# Altium PCB mcuCore.PcbDoc
Units mil, origin at the board's own origin, x right, y up, seen from the top; angles counter-clockwise.
Board outline 3950.03 x 3947.04 mil, 2 copper layers (Top Layer, Bottom Layer); 53 components, 77 nets, 296 pads, 91 vias.
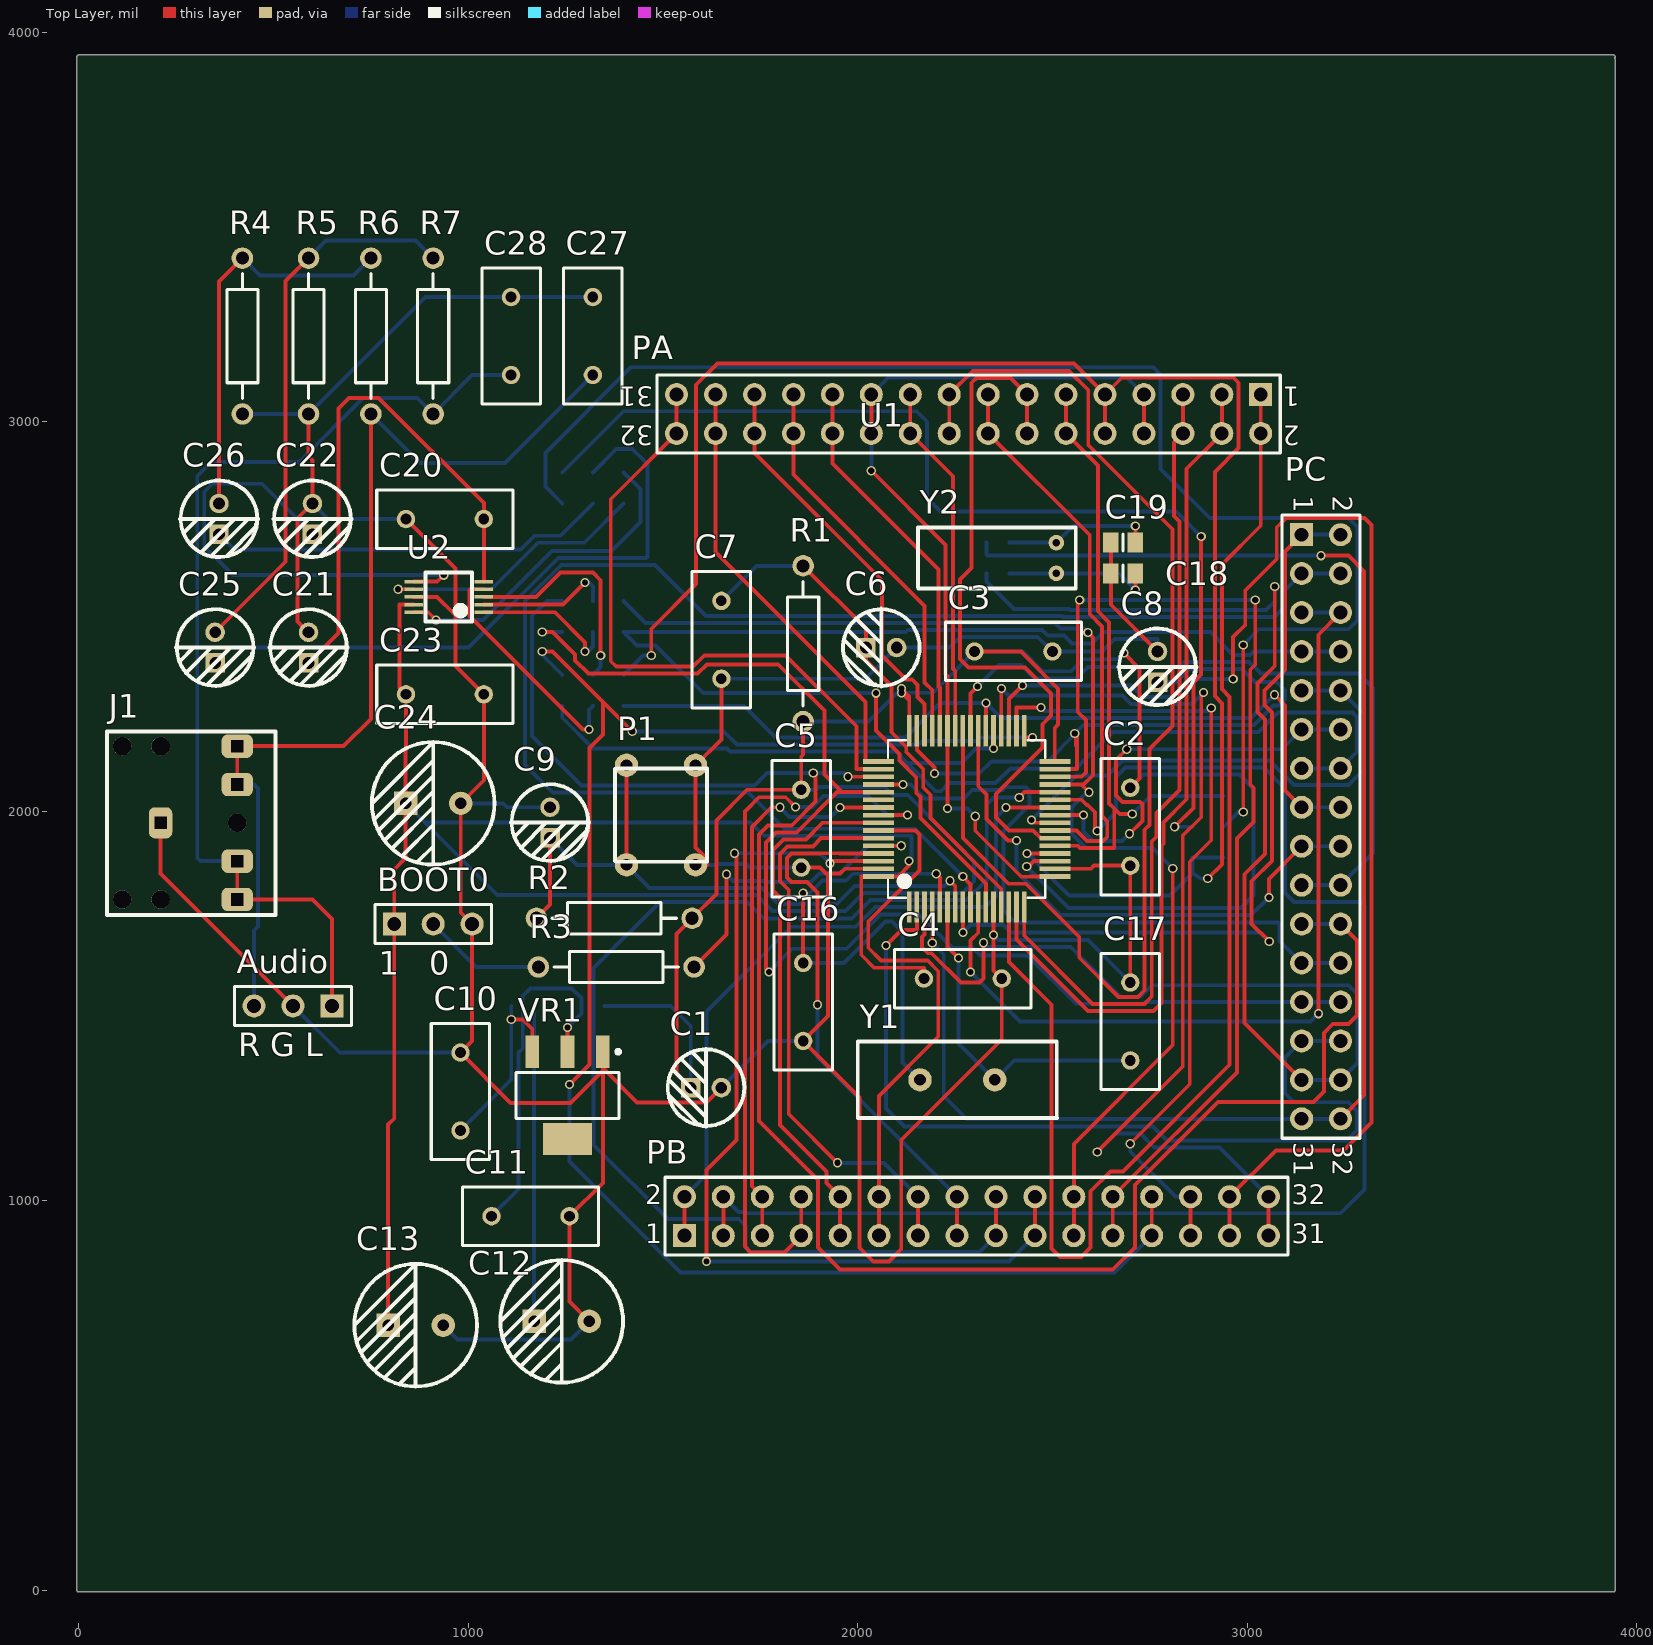
[diagram p0: Top Layer view]
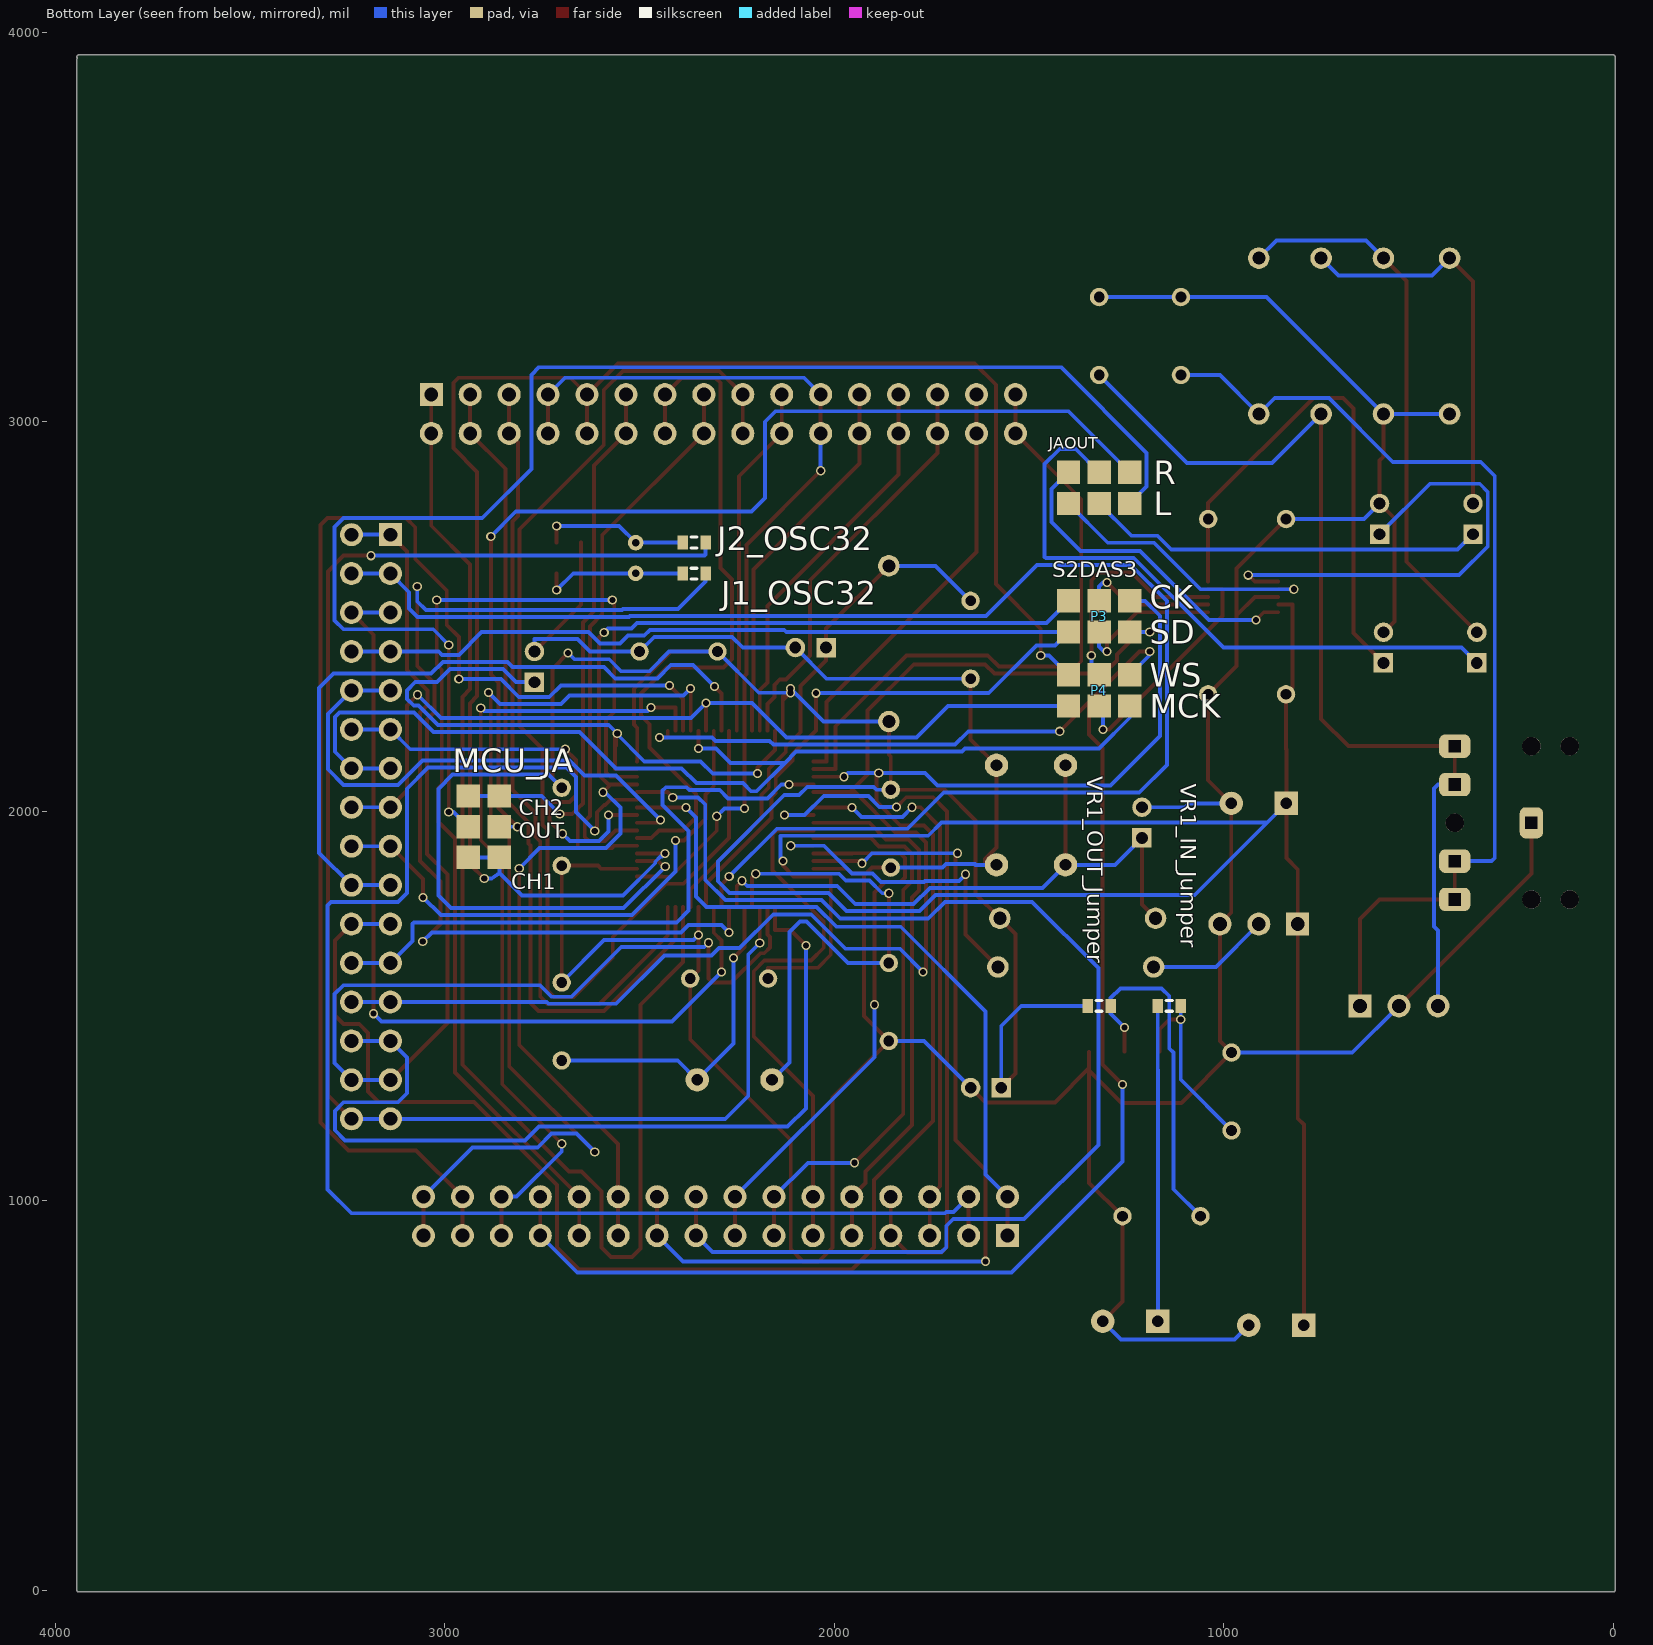
[diagram p1: Bottom Layer view, seen from below]

## Layer stack, top to bottom
Top Solder: solder mask 0.4, Solder Resist, Dk 3.5
Top Layer: signal copper 1.4
Dielectric 1: dielectric 12.6, FR-4, Dk 4.8
Bottom Layer: signal copper 1.4
Bottom Solder: solder mask 0.4, Solder Resist, Dk 3.5

## Board outline
0,-5.01 cw(c0,0) -5.01,0 -5.01,3937.01 cw(c0,3937.01) 0,3942.02 3940,3942.02 cw(c3940,3937.01) 3945.01,3937.01 cw(c3940,3937.01) 3943.59,3933.5 cw(c3940,3930) 3945.01,3930 3945.01,0 cw(c3940,0) 3938.5,-4.79 cw(c3937.01,0) 3937.01,-5.01

## Design rules (kind name [scope] priority, off if disabled: settings)
Clearance Clearance_1 [All] p1: gap=8 ignorepadtopadclearanceinfootprint=FALSE except(0: Arc-Text Arc-Hole Track-Text Track-Hole SMDPad-Text SMDPad-Hole THPad-Text THPad-Hole Via-Text Via-Hole Fill-Text Fill-Hole Poly-Text Poly-Hole Region-Text Region-Hole Text-Text Text-Hole; 9: Arc-Via Track-Via SMDPad-Via THPad-Via Via-Via)
PolygonConnect [All] p1: connectstyle=Relief reliefconductorwidth=10 reliefentries=4 polygonreliefangle="90 Angle" airgapwidth=10
RoutingVias [All] p1: holewidth=15.75 width=23.62 viastyle="Through Hole" minholewidth=13.78 minwidth=19.68 maxholewidth=28 maxwidth=50
SolderMaskExpansion [All] p1: expansion=4
Width power [InNet('+12')] p1 off: maxlimit=47.24 minlimit=10 preferedwidth=47.24
Width power_1 [InNet('VCC')] p2 off: maxlimit=47.24 minlimit=10 preferedwidth=47.24
Width [All] p3: maxlimit=10 minlimit=10 preferedwidth=10
30 further rules are at their usual default settings.

## Classes and differential pairs
component class mcuCore: C10 C11 C12 C13 C16 C17 C18 C19 J1_OSC32 J2_OSC32 P1 P2 P3 P4 PA PB PC U1 VR1 VR1_IN_Jumper VR1_OUT_Jumper Y1 Y2

## Components (designator, comment, footprint, x,y, rotation, side; value= is the part's Value field where it differs from the comment)
Audio "Header 3" HDR1X3 650,1500 r180 top (schematic designator AudioOut)
BOOT0 "Header 3" HDR1X3 810,1710 r0 top (schematic designator P2)
C1 "Cap2" Cap5x10 1610.63,1290 r0 top value=10uF
C2 "Cap" RAD-0.2 2700,1960 r90 top value=100nF
C3 "Cap" RAD-0.2 2400,2410 r180 top value=100nF
C4 "Cap" RAD-0.2 2270,1570 r180 top value=100nF
C5 "Cap" RAD-0.2 1855,1955 r90 top value=100nF
C6 "Cap2" Cap5x10 2060.63,2420 r0 top value=10uF
C7 "Cap" RAD-0.2 1650,2440 r90 top value=100nF
C8 "Cap2" Cap5x10 2770,2370.63 r90 top value=10uF
C9 "Cap2" Cap5x10 1210,1970.63 r90 top value=10uF
C10 "Cap" RAD-0.2 980,1280 r270 top value=100nF
C11 "Cap" RAD-0.2 1160,960 r180 top value=100nF
C12 "Cap Pol1" Cap8*14 1240,690 r180 top value=470uF
C13 "Cap Pol1" Cap8*14 865,680 r180 top value=470uF
C16 "Cap" RAD-0.2 1860,1510 r90 top value=22pF
C17 "Cap" RAD-0.2 2700,1460 r270 top value=22pF
C18 "Cap" 6-0805_L 2681.5,2610 r0 top value=22pF
C19 "Cap" 6-0805_L 2681.5,2690 r0 top value=22pF
C20 "Cap" RAD-0.2 940,2750 r0 top value=100nF
C21 "Cap2" Cap5x10 590,2420 r90 top value=10uF
C22 "Cap2" Cap5x10 600,2750.63 r90 top value=10uF
C23 "Cap" RAD-0.2 940,2300 r180 top value=100nF
C24 "Cap2" Cap8*14 910,2020 r180 top value=470uF
C25 "Cap2" Cap5x10 350,2420 r90 top value=10uF
C26 "Cap2" Cap5x10 360,2750.63 r90 top value=10uF
C27 "Cap" RAD-0.2 1320,3220 r270 top value=22nF
C28 "Cap" RAD-0.2 1110,3220 r270 top value=22nF
J1 "Phonejack Stereo SW" AudioJack_3F07 72.2,1970 r270 top
J1_OSC32 "Res3" J1-0603 2360,2610 r0 bottom value=0
J2_OSC32 "Res3" J1-0603 2360,2690 r0 bottom value=0
JAOUT "Header 3X2" jumper2x3 1320,2790 r0 bottom
MCU_JA "Header 3X2" jumper2x3 2940,1960 r90 bottom
P1 "Reset Button" DC_Jack 1495,1990 r90 top
P3 "Header 3X2" jumper2x3 1320,2540 r180 bottom
P4 "Header 3X2" jumper2x3 1320,2270 r0 bottom
PA "Header 16X2" HDR2X16 3035,3070 r180 top
PB "Header 16X2" HDR2X16 1555,910 r0 top
PC "Header 16X2" HDR2X16 3140,2710 r270 top
R1 "Res2" AXIAL-0.4 1860,2430 r90 top value=10
R2 "Res2" AXIAL-0.4 1375,1725 r0 top value=10K
R3 "Res2" AXIAL-0.4 1380,1600 r180 top value=100
R4 "Res2" AXIAL-0.4 420,3220 r90 top value=10K
R5 "Res2" AXIAL-0.4 590,3220 r90 top value=10K
R6 "Res2" AXIAL-0.4 750,3220 r270 top value=100
R7 "Res2" AXIAL-0.4 910,3220 r270 top value=100
U1 "Part Number: stm32f4x5rg" LQFP64-10x10mm 2280,1980 r90 top value=Value
U2 "CS4344" CS4344 950,2550 r180 top
VR1 "Volt Reg" SOT223_L 1255,1270 r270 top
VR1_IN_Jumper "Res3" J1-0603 1140,1500 r180 bottom value=0
VR1_OUT_Jumper "Res3" J1-0603 1320,1500 r0 bottom value=0
Y1 "XTAL" XTAL_8M 2256.06,1310 r0 top
Y2 "XTAL" XTAL_32k 2510,2650 r90 top

## Footprints (in the part's own frame and the unit in brackets; to place one, negate y for a bottom-side part, rotate by r counter-clockwise, add the part's x,y. Pads: shape width x height; smd on the part's side, far side on the other; paste and mask are expansions set on the pad)
6-0805_L [mm] "Chip Resistor, Body 2.0x1.2mm, IPC High Density"
  rect 1x1.3 smd: 1(-0.8,0) 2(0.8,0)
  silkscreen extent 0,-0.55 0,0.55, body extent -1.07,-0.7 1.07,0.7, height 0.7
AudioJack_3F07 [mm]
  round 1.2 hole 1.2: 0(-5,3.5) 0(-5,1) 0(0,8.5) 0(5,3.5) 0(5,1)
  rrect50% 2.032x1.524 hole 0.787 square: 1(0,3.5)
  rrect50% 1.524x2.032 hole 0.787 square: 2(-5,8.5) 3(-2.5,8.5) 4(2.5,8.5) 5(5,8.5)
  silkscreen extent -5.97,0 6,11
AXIAL-0.4 [mm] "Axial Device, Thru-Hole; 2 Leads; 0.4 in Pin Spacing"
  round 1.4 hole 0.85: 1(-5.08,0) 2(5.08,0)
  silkscreen extent -4.06,-1.02 4.06,1.02
Cap5x10 [mil]
  rect 50x50 hole 30: 1(-39.37,0)
  round 50 hole 30: 2(39.37,0)
  silkscreen extent -98,-100 98,100
Cap8*14 [mil]
  rect 60x60 hole 30: 1(70.7,0)
  round 60 hole 30: 2(-70.7,0)
  silkscreen extent -157,-157 157,157
CS4344 [mm]
  rect 1.2x0.225 smd: 1(-2.286,1) 2(-2.286,0.5) 3(-2.286,0) 4(-2.286,-0.5) 5(-2.286,-1) 6(2.286,-1) 7(2.286,-0.5) 8(2.286,0) 9(2.286,0.5) 10(2.286,1)
  silkscreen extent -1.52,-1.6 1.52,1.6
DC_Jack [mil]
  round 60 hole 30: 1(-127.95,88.58) 2(127.95,88.58) 3(127.95,-88.58) 4(-127.95,-88.58)
  Top Layer lines w10: -120,-118.11 -113.11,-118.11
  silkscreen extent -120,-118 120,118
HDR1X3 [mm] "Connector; Header; 3 Position"
  rect 1.5x1.5 hole 0.9: 1(0,0)
  round 1.5 hole 0.9: 2(2.54,0) 3(5.08,0)
  silkscreen extent -1.27,-1.27 6.35,1.27
HDR2X16 [mm] "Connector; Header; 16x2 Position"
  rect 1.5x1.5 hole 0.9: 1(0,0)
  round 1.5 hole 0.9: 2(0,2.54) 3(2.54,0) 4(2.54,2.54) 5(5.08,0) 6(5.08,2.54) 7(7.62,0) 8(7.62,2.54) 9(10.16,0) 10(10.16,2.54) 11(12.7,0) 12(12.7,2.54) 13(15.24,0) 14(15.24,2.54) 15(17.78,0) 16(17.78,2.54) 17(20.32,0) 18(20.32,2.54) 19(22.86,0) 20(22.86,2.54) 21(25.4,0) 22(25.4,2.54) 23(27.94,0) 24(27.94,2.54) 25(30.48,0) 26(30.48,2.54) 27(33.02,0) 28(33.02,2.54) 29(35.56,0) 30(35.56,2.54) 31(38.1,0) 32(38.1,2.54)
  silkscreen extent -1.27,-1.27 39.37,3.81
J1-0603 [mm] "Chip Resistor, Body 1.6x0.8mm, IPC High Density"
  rect 0.7x0.9 smd: 1(-0.75,0) 2(0.75,0)
  silkscreen extent -0.2,-0.35 0.2,0.35, body extent -0.85,-0.48 0.85,0.48, height 0.9
jumper2x3 [mil]
  rect 60x60 smd: 1(-78.74,0) 2(0,0) 3(78.74,0) 4(-78.74,-80) 5(0,-80) 6(78.74,-80)
LQFP64-10x10mm [mil]
  rect 80x12 smd: 1(-226.38,147.64) 2(-226.38,127.95) 3(-226.38,108.27) 4(-226.38,88.58) 5(-226.38,68.9) 6(-226.38,49.21) 7(-226.38,29.53) 8(-226.38,9.84) 9(-226.38,-9.84) 10(-226.38,-29.53) 11(-226.38,-49.21) 12(-226.38,-68.9) 13(-226.38,-88.58) 14(-226.38,-108.27) 15(-226.38,-127.95) 16(-226.38,-147.64) 33(226.38,-147.64) 34(226.38,-127.95) 35(226.38,-108.27) 36(226.38,-88.58) 37(226.38,-68.9) 38(226.38,-49.21) 39(226.38,-29.53) 40(226.38,-9.84) 41(226.38,9.84) 42(226.38,29.53) 43(226.38,49.21) 44(226.38,68.9) 45(226.38,88.58) 46(226.38,108.27) 47(226.38,127.95) 48(226.38,147.64)
  rect 12x80 smd: 17(-147.64,-226.38) 18(-127.95,-226.38) 19(-108.27,-226.38) 20(-88.58,-226.38) 21(-68.9,-226.38) 22(-49.21,-226.38) 23(-29.53,-226.38) 24(-9.84,-226.38) 25(9.84,-226.38) 26(29.53,-226.38) 27(49.21,-226.38) 28(68.9,-226.38) 29(88.58,-226.38) 30(108.27,-226.38) 31(127.95,-226.38) 32(147.64,-226.38) 49(147.64,226.38) 50(127.95,226.38) 51(108.27,226.38) 52(88.58,226.38) 53(68.9,226.38) 54(49.21,226.38) 55(29.53,226.38) 56(9.84,226.38) 57(-9.84,226.38) 58(-29.53,226.38) 59(-49.21,226.38) 60(-68.9,226.38) 61(-88.58,226.38) 62(-108.27,226.38) 63(-127.95,226.38) 64(-147.64,226.38)
  silkscreen extent -202,-202 202,202, body extent 0,0 10,10, height 10
RAD-0.2 [mm] "Radial Cap, Thru-Hole; 2 Leads; 0.2 in Pin Spacing"
  round 1.2 hole 0.7: 1(-2.54,0) 2(2.54,0)
  silkscreen extent -4.44,-1.91 4.44,1.91
SOT223_L [mm] "SOT223, 4-Leads, Body 6.5x3.5mm, Pitch 2.3mm, Lead Span 7mm, IPC High Density"
  rect 2.1x0.9 smd: 1(-2.85,2.3) 2(-2.85,0) 3(-2.85,-2.3)
  rect 2.1x3.2 smd: 4(2.85,0)
  silkscreen extent -2.97,-3.35 1.5,3.43, body extent -1.85,-3.35 1.85,3.35, height 1.7
XTAL_8M [mil]
  round 60 hole 30: 1(-96.06,0) 2(96.06,0)
  silkscreen extent -256,-98 256,98
XTAL_32k [mil]
  round 40 hole 20: 1(-39.37,0) 2(39.37,0)
  silkscreen extent -79,-50 79,355

## Part data
Audio BOOT0: "Header, 3-Pin", LatestRevisionDate=17-Jul-2002, LatestRevisionNote="Re-released for DXP Platform.", Publisher="Altium Limited"
C1 C2 C3 C4 C5 C6 C7 C8 C9 C10 C11 C16 C17 C18 C19 C20 C21 C22 C23 C24 C25 C26 C27 C28: "Capacitor", Publisher="Altium Limited"
  C1 C6 C8 C9 C21 C22 C24 C25 C26: PackageDescription="Capacitor; 2 Leads", PackageReference=CAPR5-4X5, Published=23-Sep-2002
  C2 C3 C4 C5 C7 C10 C11 C16 C17 C18 C19 C20 C23 C27 C28: LatestRevisionDate=17-Jul-2002, LatestRevisionNote="Re-released for DXP Platform.", PackageDescription="Radial Cap, Thru-Hole; 2 Leads; 0.3 in Pin Spacing", PackageReference=RAD-0.3, Published=8-Jun-2000
C12 C13: "Polarized Capacitor (Radial)", LatestRevisionDate=17-Jul-2002, LatestRevisionNote="Re-released for DXP Platform.", PackageDescription="Polarized Capacitor (Radial); 2 Leads", PackageReference=RB7.6-15, Published=8-Jun-2000, Publisher="Altium Limited"
J1: "3-Conductor Jack with 2 break contacts (normals) and 2 auxiliary make contacts", ComponentLink1Description="Manufacturer Link", ComponentLink1URL=http://domino.kycon.com/internet/Products.html, DatasheetDocument=07-Mar-2000, LatestRevisionDate=17-Dec-2003, LatestRevisionNote="PCB Footprint replaced.", Published=5-Jan-2004, Publisher="Altium Limited"
J1_OSC32 J2_OSC32 R1 R2 R3 R4 R5 R6 R7 VR1_IN_Jumper VR1_OUT_Jumper: "Resistor", Published=8-Jun-2000, Publisher="Altium Limited"
  J1_OSC32 J2_OSC32 VR1_IN_Jumper VR1_OUT_Jumper: LatestRevisionDate=29-May-2009, LatestRevisionNote="IPC-7351 Footprint Added.", PackageDescription="Chip Resistor", PackageReference=J1-0603
  R1 R2 R3 R4 R5 R6 R7: LatestRevisionDate=17-Jul-2002, LatestRevisionNote="Re-released for DXP Platform.", PackageDescription="Axial Device, Thru-Hole; 2 Leads; 0.4 in Pin Spacing", PackageReference=AXIAL-0.4
JAOUT MCU_JA P3 P4: "Header, 3-Pin, Dual row", LatestRevisionDate=17-Jul-2002, LatestRevisionNote="Re-released for DXP Platform.", Publisher="Altium Limited"
P1: library part "Header 2X2", "Header, 2-Pin, Dual row", LatestRevisionDate=17-Jul-2002, LatestRevisionNote="Re-released for DXP Platform.", Publisher="Altium Limited"
PA PB PC: "Header, 16-Pin, Dual row", LatestRevisionDate=17-Jul-2002, LatestRevisionNote="Re-released for DXP Platform.", Publisher="Altium Limited"
U1: library part STM32F4x5RG, "No Description Available", Manufacturer_Part_Number=stm32f4x5rg, Copyright="Copyright (C) 2016 Accelerated Designs. All rights reserved", RefDes=RefDes, Type=DEV, Vendor=STMicroelectronics
VR1: "Voltage Regulator", LatestRevisionDate=29-May-2009, LatestRevisionNote="IPC-7351 Footprint Added.", PackageDescription="3-Pin Transistor Outline Package 2.54 mm Pitch, 15.1 mm Lead Span", PackageReference=D2PAK, Published=24-Mar-1999, Publisher="Altium Limited"
Y1 Y2: "Crystal Oscillator", LatestRevisionDate=17-Jul-2002, LatestRevisionNote="Re-released for DXP Platform.", PackageDescription="Crystal, Thru-Hole; 2 Leads; Body 3.1 x 8.2 mm (Dia.xH)", PackageReference=R38, Published=8-Jun-2000, Publisher="Altium Limited"

## Via types
v1: diameter 23.62, hole 15.75, Top Layer to Bottom Layer, 91 vias

## Nets (pads, with @x,y where several pads share a name; then routed paths per layer and width w, separated by ;. In a path a pad name is that pad's centre, name@x,y a point inside that pad or via, vN(x,y) a via of type N, cw(c..) or ccw(c..) an arc to the next point about the centre after c; other vN are vias at no path point)
+12: C12.1 VR1_IN_Jumper.1 | length 810.1
  Bottom Layer w10: C12.1 1169.3,1335.38 1169.53,1335.61 VR1_IN_Jumper.1
AOUTG: Audio.2 BOOT0.3 C1.2 C2.1 C3.1 C4.1 C5.1 C6.2 C7.1 C8.2 C9.2 C10.1 C11.1 C12.2 C13.2 C16.1 C17.1 C18.1 C19.1 C20.1 C21.2 C22.2 C23.1 C24.2 C27.1 C28.1 J1.1 P1.3 P1.4 R4.1 R5.1 U1.12 U1.18 U1.63 U2.8 VR1.1 | length 12708.3
  Top Layer w10: J1.1 210,1840 Audio.2 ; C21.2 562,2487.37 562,2752 C22.2 600,2900 590,2910 R5.1 ; C20.1 967,2623 967,2503 ; U2.8 920,2550 967,2503 ; C12.2 1260,740.7 C11.1 1345.55,1045.55 1345.55,1334 ; VR1.1 1345.55,1340 ; P1.4 1613.11,1862.05 1613.11,1870 ; 1613.11,1876.89 1583.58,1906.42 P1.3 1650,2184.37 C7.1 ; C1.2 1612,1252 1433.55,1252 1345.55,1340 ; C5.1 1903.33,1855 1918.53,1839.8 1923.81,1839.8 ; U1.63 1967.2,1852.05 1954.95,1839.8 1923.81,1839.8 ; U1.12 v1@2348.9,1682.1 ; v1(2349,1682) v1@2348.9,1682.1 ; U1.18 2599,1852.05 2606.95,1860 C2.1 C17.1 ; C19.1 C18.1 2650,2530 C8.2 ; 967,2503 967,2373 C23.1 1040,2079.3 C24.2 980.7,1739.3 BOOT0.3 1010,1410 C10.1 1109,1251 1262.55,1251 1345.55,1334 ; 1345.55,1334 1345.55,1340 ; 1923.81,1839.8 1923.81,1473.81 C16.1 2005,1265 2005,879 2040,844 2080,844 2112,876 2112,1156 2370,1414 C4.1 2348.9,1591.1 v1@2348.9,1682.1
  Bottom Layer w10: R4.1 R5.1 890,3320 C28.1 C27.1 ; Audio.2 670,1380 C10.1 ; C22.2 640,2750 C20.1 ; C13.2 972.7,643 1263.7,643 C12.2 ; C24.2 1090,2020 1100,2010 C9.2 ; P1.4 1637.19,1862.05 1638.95,1863.81 1713.24,1863.81 1722.05,1855 C5.1 ; C1.2 1770,1410 C16.1 ; C7.1 2020,2340 C6.2 2235.01,2420 2262.51,2447.5 2462.5,2447.5 C3.1 2627.33,2410 2659.15,2441.81 2770,2441.81 C8.2 ; v1(2349,1682) 2362,1669 2591,1669 C17.1
AOUTL: Audio.1 C28.2 J1.4 J1.5 R7.2 | length 2620.3
  Top Layer w10: J1.4 J1.5 600,1773.15 650,1723.15 Audio.1
  Bottom Layer w10: J1.4 312,1871.57 304,1879.57 304,2861 340,2897 566,2897 730,3061 869,3061 R7.2 1010,3120 C28.2
AOUTL_B: C26.1 JAOUT.2 | length 1025.1
  Bottom Layer w10: C26.1 399.26,2672 1134.88,2672 1170,2707.12 1237.12,2707.12 JAOUT.2
AOUTR: Audio.3 C27.2 J1.2 J1.3 R6.2 | length 2589.4
  Top Layer w10: J1.3 J1.2 680,2166.85 750,2236.85 R6.2
  Bottom Layer w10: J1.3 450,2068.43 460,2058.43 460,1704 450,1694 Audio.3 ; R6.2 876,2894 1094,2894 C27.2
AOUTR_B: C25.1 JAOUT.5 | length 1641.8
  Bottom Layer w10: C25.1 389.37,2420 1001,2420 1231.06,2650.06 1456.94,2650.06 1460,2653.12 1460,2891 1421,2930 1380,2930 JAOUT.5
BOOT0: R3.1 U1.60 | length 826.6
  Top Layer w10: R3.1 1663,1683 v1(1663,1838) ; U1.60 v1(2112,1911.1)
  Bottom Layer w10: v1(1663,1838) 1680.18,1820.82 1767.08,1820.82 1769.9,1818 1880,1818 1901.8,1839.8 1954.95,1839.8 2026.26,1911.1 v1(2112,1911.1)
DAC_AOUTL: JAOUT.3 U2.7 | length 710
  Top Layer w10: v1(820,2569.69) U2.7
  Bottom Layer w10: v1(820,2569.69) 1059.21,2569.69 1178.64,2689.12 1297.86,2689.12 JAOUT.3
DAC_AOUTR: JAOUT.6 U2.10 | length 839.7
  Top Layer w10: U2.10 897.37,2510.63 v1(917,2491)
  Bottom Layer w10: v1(917,2491) 1037.71,2491 1214.77,2668.06 1367.44,2668.06 1442,2742.62 1442,2826.74 JAOUT.6
DAC_CK: P3.2 U2.2 | length 344.6
  Top Layer w10: U2.2 1243.32,2530.32 v1(1300,2587)
  Bottom Layer w10: v1(1300,2587) 1310,2587 1320,2577 P3.2
DAC_MCK: P4.2 U2.4 | length 595.8
  Top Layer w10: U2.4 1004.88,2569.69 1003.38,2568.19 1003.38,2500.82 1294.19,2210 v1(1310,2210)
  Bottom Layer w10: v1(1310,2210) 1310,2260 P4.2
DAC_OUT1: MCU_JA.1 MCU_JA.4 P4.6 PA.9 PA.10 U1.20 | length 4459.8
  Top Layer w10: v1(1470,2400) 1470,2468.07 1585,2583.07 1585,3095 1640,3150 2555,3150 PA.9 ; v1(2434.57,1891.42) U1.20 ; PA.10 PA.9 ; v1(2899.03,1827) 2935.55,1863.52 2935.55,2276.83 2917.19,2295.19 2917.19,2871.19 2978,2932 2978,3100 2965,3113 2678,3113 PA.9
  Bottom Layer w10: P4.6 1448.74,2400 v1(1470,2400) ; v1(2434.57,1891.42) 2442.89,1883.09 2446.72,1883.09 2459.81,1870 2459.81,1866.17 2542.99,1783 2802.12,1783 2860,1840.88 ; v1(2899.03,1827) 2880,1827 2860,1840.88 ; MCU_JA.1 MCU_JA.4 2860,1840.88
DAC_OUT2: MCU_JA.3 MCU_JA.6 PA.11 PA.12 U1.21 | length 1677.2
  Top Layer w10: U1.21 2565.27,1911.1 2571.19,1905.19 2658.81,1905.19 ; PA.11 PA.12 2617,2888 2617,2513.31 2645.38,2484.93 2645.38,2020 2658.84,2006.53 ; 2658.84,1905.22 2658.84,2006.53 ; v1(2705.06,1992.47) 2672.91,1992.47 2658.84,2006.53
  Bottom Layer w10: v1(2705.06,1992.47) 2751.33,2038.74 MCU_JA.6 MCU_JA.3
DAC_SD: P3.5 U2.1 | length 377.5
  Top Layer w10: U2.1 1222.37,2510.63 1300,2433 v1(1300,2410)
  Bottom Layer w10: v1(1300,2410) 1307,2410 1320,2423 P3.5
DAC_WS: P4.5 U2.3 | length 585.7
  Top Layer w10: U2.3 1174,2550 1237,2613 1320,2613 1340,2593 v1(1340,2400)
  Bottom Layer w10: P4.5 1340,2370 v1(1340,2400)
I2S2_CK: P3.1 PB.21 PB.22 U1.29 | length 3206.8
  Top Layer w10: U1.29 2574,2068.58 ; PB.21 PB.22 2555,1145.21 2809,1399.21 v1(2809,1853) ; v1(2591,2459) 2603.81,2446.19 2603.81,2092.17 2580.22,2068.58 2574,2068.58 ; v1(2594,2048.58) 2574,2068.58
  Bottom Layer w10: P3.1 1455.24,2483.5 2506.2,2483.5 2520.7,2469 2581,2469 v1(2591,2459) ; v1(2594,2048.58) 2588.58,2048.58 2549,2009 2549,1942.19 2586,1905.19 2756.81,1905.19 v1(2809,1853)
I2S2_MCK: P4.1 PC.13 PC.14 U1.37 | length 2769.9
  Top Layer w10: v1(2348.9,2161) U1.37
  Bottom Layer w10: P4.1 1241.26,2239.74 1320,2161 1664,2161 1672,2153 2098,2153 2127,2124 ; v1(2348.9,2161) 2303.92,2161 2266.92,2124 2127,2124 ; PC.13 PC.14 3282.53,2152.53 3282.53,2241.47 3271,2253 3079.47,2253 3029.66,2203.19 2654.19,2203.19 2561,2110 2392.09,2110 2354,2071.91 2234.72,2071.91 2213.8,2050.98 2200.02,2050.98 2127,2124
I2S2_SD: P3.4 PC.7 PC.8 U1.11 | length 3277.9
  Top Layer w10: v1(2047,2303) 2047,2206.64 2107,2146.64 2107,2129.81 2150.28,2086.53 2150.28,2046.72 2161,2036 2161,1982 2329.21,1813.79 U1.11
  Bottom Layer w10: v1(2047,2303) 1603.5,2303 1480.69,2425.81 1432.93,2425.81 P3.4 2123.5,2460 2129,2465.5 2473.5,2465.5 2488,2451 2530,2451 2550.73,2430.27 2601.89,2430.27 2631.43,2459.81 2905.56,2459.81 2964.19,2401.19 3007,2401.19 3015.81,2410 PC.7 PC.8
I2S2_WS: P4.4 PB.25 PB.26 U1.33 | length 4453.4
  Top Layer w10: v1(1190,2410) 1216,2410 1346,2280 ; v1(1260,1298) 1311,1349 1311,2162 1346,2197 1346,2280 ; v1(1421,2205) 1346,2280 ; U1.33 2427.64,2189 v1(2449,2189) ; PB.25 PB.26
  Bottom Layer w10: v1(1190,2410) 1190,2401.26 P4.4 ; v1(1260,1298) 1260,1100 1545,815 2660,815 PB.25 ; v1(1421,2205) 1656,2205 1690,2171 2156.62,2171 2166,2180.38 2305.38,2180.38 2314,2189 v1(2449,2189)
I2S3_CK: P3.3 PC.21 PC.22 U1.51 | length 4952.6
  Top Layer w10: v1(1886,2098) 1892,2092 1892,2024.85 1830.77,1963.62 1770,1963.62 1746.19,1939.81 1746.19,1204.81 1898,1053 1898,880 1955,823 2655,823 2712,880 2712,1040 2925,1253 3170,1253 3197,1280 3197,1430 3220,1453 3260,1453 3282.53,1475.53 3282.53,1667.47 PC.22 ; v1(1975,2088.27) U1.51
  Bottom Layer w10: P3.3 1202.37,2540 1164.19,2501.82 1164.19,2192.81 1291,2066 1735,2066 1767,2098 v1(1886,2098) 1965.27,2098 v1(1975,2088.27) ; PC.21 PC.22
I2S3_MCK: P4.3 PC.15 PC.16 U1.38 | length 2272.1
  Top Layer w10: U1.38 v1(2329.21,2278) ; v1(3070,2299) 3097.47,2271.53 3097.47,2052.53 PC.15
  Bottom Layer w10: P4.3 1708,2270 1789,2189 2122.68,2189 2211.68,2278 v1(2329.21,2278) 2367.95,2239.26 2882.19,2239.26 2882.26,2239.19 3010.19,2239.19 v1(3070,2299) ; PC.15 PC.16
I2S3_SD: P3.6 PC.25 PC.26 U1.53 | length 3421.6
  Top Layer w10: v1(1190,2460) 1216.5,2460 1274.19,2402.31 1274.19,2387.19 1308.38,2353 1589,2353 1613,2377 1796,2377 1914.56,2258.44 1914.56,2094.34 1960,2048.9 ; v1(1772,1587) 1764.38,1594.62 1764.38,1920 1790,1945.62 1843.62,1945.62 1946.9,2048.9 1960,2048.9 ; U1.53 1960,2048.9
  Bottom Layer w10: v1(1190,2460) P3.6 ; v1(1772,1587) 1831.62,1646.62 1970.9,1646.62 2059.32,1735.05 2156.76,1735.05 2243,1648.81 2295.88,1648.81 2315.19,1629.5 2436.5,1629.5 2560.62,1505.38 2734.38,1505.38 2739,1510 PC.25 PC.26
MCU_AOUTL: JAOUT.1 MCU_JA.2 | length 3688.9
  Top Layer w10: v1(2990,1998) v1(2990,2427)
  Bottom Layer w10: JAOUT.1 1198,2833.26 1198,2920 1418,3140 2758,3140 2778,3120 2778,2879 2904,2753 3260,2753 3283,2730 3283,2490 3260,2467 3030,2467 v1(2990,2427) ; MCU_JA.2 2978,1998 v1(2990,1998)
MCU_AOUTR: JAOUT.4 MCU_JA.5 | length 2773.1
  Top Layer w10: v1(2814,1960) 2862.19,2008.19 2862.19,2330.81 2882,2350.62 v1(2882,2705)
  Bottom Layer w10: JAOUT.4 1398.26,3027 2151,3027 2178,3000 2178,2804 2213,2769 2818,2769 v1(2882,2705) ; v1(2814,1960) MCU_JA.5
NetC6_1: C6.1 C7.2 R1.2 U1.13 | length 1334.3
  Top Layer w10: R1.2 2021.26,2468.74 C6.1 2021.26,2386.74 2086.55,2321.45 2086.55,2202.71 2124.62,2164.64 2124.62,2151.76 2168.28,2108.11 2168.28,2060.72 2187,2042 2187,1982 2368.58,1800.42 U1.13
  Bottom Layer w10: C7.2 1740,2630 R1.2
NetC8_1: C8.1 U1.31 U1.47 | length 1682
  Top Layer w10: U1.47 2152.05,2156.95 2197,2112 v1(2197,2096.8) ; U1.31 2562.95,2107.95 2562.95,2166.05 ; v1(2557.44,2199.44) 2562.95,2193.93 2562.95,2166.05 ; v1@2560,2200 2560,2169 2562.95,2166.05
  Bottom Layer w10: v1(2197,2096.8) 2312.12,2096.8 2343.33,2128 2488,2128 v1@2560,2200 ; v1(2557.44,2199.44) 2579.19,2221.19 3018.19,2221.19 3068,2271 3080,2271 3097.47,2288.47 3097.47,2310 3076.21,2331.26 3020.73,2331.26 2987.17,2364.82 2850.83,2364.82 2817.27,2331.26 C8.1
NetC10_2: C10.2 VR1.3 VR1_IN_Jumper.2 | length 496.5
  Top Layer w10: v1(1110.47,1465) 1140,1465 1164.45,1440.55 VR1.3
  Bottom Layer w10: C10.2 1110.47,1310.47 v1(1110.47,1465) VR1_IN_Jumper.2
NetC11_2: C11.2 VR1.2 VR1_OUT_Jumper.1 | length 919.7
  Top Layer w10: VR1.2 v1(1255,1444.53)
  Bottom Layer w10: C11.2 1129,1029 1129,1380 1140,1391 1140,1525 1160,1545 1265.47,1545 1290.47,1520 VR1_OUT_Jumper.1 1290.47,1480 v1(1255,1444.53)
NetC20_2: C20.2 C21.1 U2.5 | length 1382.9
  Top Layer w10: C21.1 667,2457.63 667,3034 694,3061 770,3061 1040,2791 C20.2 U2.5
NetC22_1: C22.1 U2.6 | length 1209.8
  Top Layer w10: U2.6 920.37,2589.37 v1(937,2606)
  Bottom Layer w10: C22.1 470.52,2840.74 342.74,2840.74 322,2820 322,2680 396,2606 v1(937,2606)
NetC25_2: C25.2 R5.2 R7.1 | length 1417.3
  Top Layer w10: C25.2 531,2640.37 531,3361 R5.2
  Bottom Layer w10: R5.2 635,3465 865,3465 R7.1
NetC26_2: C26.2 R4.2 R6.1 | length 1022.1
  Top Layer w10: C26.2 360,3360 R4.2
  Bottom Layer w10: R4.2 465,3375 705,3375 R6.1
NetJ1_OSC32_1: J1_OSC32.1 PC.29 PC.30 U1.3 | length 3989.8
  Top Layer w10: U1.3 2171.73,1683.73 2165,1677 2165,1650 2180,1635 2190,1635 2265,1560 2313,1560 2323,1570 v1(2323,1662) ; v1(3071,2577) 3071,2373.11 3026.19,2328.3 3026.19,2254.85 3045.85,2235.19 3045.85,1890.19 2993.66,1838 2993.66,1456.34 PC.29
  Bottom Layer w10: v1(2323,1662) 2334,1651 2547,1651 2674.62,1523.38 2726.38,1523.38 2756,1553 3260,1553 3283,1530 3283,1353 PC.30 PC.29 ; J1_OSC32.1 2330.47,2590 2400.97,2519.5 2542.2,2519.5 2545.51,2516.19 3049,2516.19 3071,2538.19 v1(3071,2577)
NetJ2_OSC32_1: J2_OSC32.1 PC.31 PC.32 U1.4 | length 3989.9
  Top Layer w10: v1(2191.42,1661.81) U1.4 ; v1(3190,2656) 3260,2656 3300.53,2615.47 3300.53,1270.53 PC.32
  Bottom Layer w10: v1(2191.42,1661.81) 2221,1632.23 2221,1269 2280,1210 PC.31 PC.32 ; J2_OSC32.1 2330.47,2659 2333.47,2656 v1(3190,2656)
NetP2_2: BOOT0.2 R3.2 | length 315.6
  Bottom Layer w10: BOOT0.2 1020,1600 R3.2
NetPA_1: PA.1 PA.2 U1.14 | length 3447.7
  Top Layer w10: U1.14 2388.27,1612.73 2498,1503 2498,877 2520,855 2573,855 2598,880 2598,1024 2648.82,1074.82 2680.85,1074.82 2954.92,1348.89 2954.92,2293.47 2935.19,2313.2 2935.19,2633 3035,2732.81 PA.2 PA.1
NetPA_3: PA.3 PA.4 U1.15 | length 2167
  Top Layer w10: U1.15 2407.95,1670 2590.95,1487 2760,1487 2780,1507 2780,1911.49 2784.88,1916.37 2784.88,1971.12 2844.19,2030.44 2844.19,2879.19 PA.4 PA.3
NetPA_13: PA.13 PA.14 U1.22 | length 1807.5
  Top Layer w10: PA.14 PA.13 2392.47,3112.53 2305,3112.53 2292.47,3100 2292.47,2624 2263,2594.53 2263,2390.76 2284.76,2369 2430,2369 2496.81,2302.19 2496.81,2245.17 2474.81,2223.17 2474.81,2163.19 2355.19,2043.56 2355.19,1983.72 2388.09,1950.81 2449.98,1950.81 2470,1930.79 U1.22
NetPA_15: PA.15 PA.16 U1.23 | length 1412.9
  Top Layer w10: PA.15 PA.16 2595.81,2709.19 2595.81,2505.81 2627.38,2474.25 2627.38,1987.38 2640.84,1973.91 2640.84,1934.03 2630,1923.19 2589.19,1923.19 2561.9,1950.47 U1.23
NetPA_17: PA.17 PA.18 U1.41 | length 3112
  Top Layer w10: PA.18 PA.17 2295.53,3130.53 2542.47,3130.53 2592,3081 2592,2940 2808,2724 2808,2218.53 2748.88,2159.41 2748.88,1964.25 2737,1952.37 2737,1540 2720,1523 2669.5,1523 2569,1623.5 2569,1677 2432.36,1813.64 2387.58,1813.64 2270.16,1931.06 U1.41
NetPA_23: PA.23 PA.24 U1.44 | length 978
  Top Layer w10: PA.23 1935,3020 PA.24 1935,2893 2207.64,2620.36 2207.64,2320.36 2211.1,2316.9 U1.44
NetPA_25: PA.25 PA.26 U1.45 | length 1011.3
  Top Layer w10: PA.25 PA.26 1835,2864 2171.73,2527.27 2171.73,2330.81 2191.42,2311.13 U1.45
NetPA_27: PA.27 PA.28 U1.46 | length 1054
  Top Layer w10: PA.27 PA.28 1735,2920 2062,2593 2062,2400 2123.87,2338.13 2140,2338.13 2153.73,2324.4 2153.73,2293.13 2171.73,2275.13 U1.46
NetPA_29: PA.29 PA.30 U1.49 | length 1135.5
  Top Layer w10: PA.29 PA.30 1635,2665 2020,2280 2020,2127.64 U1.49
NetPA_31: PA.31 PA.32 U1.50 | length 1645.9
  Top Layer w10: PA.31 PA.32 1366,2801 1366,2385 1380,2371 1577,2371 1606,2400 1815,2400 1997,2218 1997,2107.95 U1.50
NetPB_1: PB.1 PB.2 U1.26 | length 1829.4
  Top Layer w10: PB.1 PB.2 ; v1(2381,2009.53) U1.26
  Bottom Layer w10: PB.2 1612,1067 1612,1485.81 1829.41,1703.22 1994.75,1703.22 2045.24,1753.72 2327.72,1753.72 2355.01,1781.01 2355.01,1983.54 v1(2381,2009.53)
NetPB_3: PB.3 PB.4 U1.27 | length 3795.4
  Top Layer w10: PB.3 PB.4 ; U1.27 2574.79,2029.21 2588.19,2015.81 2590.69,2015.81 2609.38,1997.12 2609.38,1954.62 v1(2615,1949)
  Bottom Layer w10: PB.4 1694,971 1712,971 1715.53,967.47 3240,967.47 3301,1028.47 3301,1758 3292,1767 3120,1767 3097.47,1789.53 3097.47,2057.53 3043,2112 2687.38,2112 2663.38,2088 2663.38,1997.38 v1(2615,1949)
NetPB_5: PB.5 PB.6 U1.55 | length 1427.5
  Top Layer w10: PB.5 PB.6 1728.19,1036.81 1728.19,1959.81 1778.38,2010 v1(1800.38,2010) ; v1(1954.53,2009.53) U1.55
  Bottom Layer w10: v1(1800.38,2010) 1825.19,1985.19 1930.19,1985.19 v1(1954.53,2009.53)
NetPB_7: PB.7 PB.8 U1.56 | length 1935.8
  Top Layer w10: v1(1840,2011) 1815.19,2035.81 1746.57,2035.81 1710.19,1999.43 1710.19,881.81 1725,867 1812,867 PB.7 PB.8 ; U1.56 v1(2128,1989.84)
  Bottom Layer w10: v1(1840,2011) 1884.62,2011 1912.49,2038.87 2027.21,2038.87 2076.24,1989.84 v1(2128,1989.84)
NetPB_9: PB.9 PB.10 U1.57 | length 1361.8
  Top Layer w10: PB.9 PB.10 1919.57,1045.43 1919.57,1074.57 1800.38,1193.77 1800.38,1778.19 1782.38,1796.19 1782.38,1900 1810,1927.62 1867,1927.62 1909.53,1970.16 U1.57
NetPB_11: PB.11 PB.12 U1.58 | length 1401.8
  Top Layer w10: U1.58 2148.53,1950.47 2159,1940 2159,1848 2027.19,1716.19 2027.19,1649.19 2060.38,1616 2180,1616 2207,1589 2207,1421 2055,1269 PB.12 PB.11
NetPB_13: PB.13 PB.14 U1.59 | length 1467.3
  Top Layer w10: v1(1948,1097) 1823,1222 1823,1797.38 1800.38,1820 1800.38,1890 1820,1909.62 1885,1909.62 1906.16,1930.79 U1.59 ; PB.13 PB.14
  Bottom Layer w10: v1(1948,1097) 2068,1097 PB.14
NetPB_15: PB.15 PB.16 U1.61 | length 1414.6
  Top Layer w10: v1(1897,1503) 1897,1791.38 1870,1818.38 1830,1818.38 1818.38,1830 1818.38,1880 1830,1891.62 1903,1891.62 1903.19,1891.81 1954.42,1891.81 1954.81,1891.42 U1.61 ; PB.15 PB.16
  Bottom Layer w10: v1(1897,1503) 1897,1368 PB.16
NetPB_17: PB.17 PB.18 U1.28 | length 3271
  Top Layer w10: PB.17 PB.18 ; v1(2415,2035.34) 2428.56,2048.9 U1.28
  Bottom Layer w10: PB.17 2312.47,867.47 1725,867.47 1712.47,880 1712.47,934.53 1694.47,952.53 1512.47,952.53 1322,1143 1322,1596.86 1491.96,1766.82 1715.9,1766.82 1758.81,1723.91 1984.65,1723.91 2032.46,1771.72 2279.72,1771.72 2331.5,1823.5 2331.5,2016.84 2350,2035.34 v1(2415,2035.34)
NetPB_19: PB.19 PB.20 U1.62 | length 2435.1
  Top Layer w10: v1(1612,844) 1612,1079 1689,1156 1689,1887 v1(1684,1892) ; v1(1929,1866) 1934.73,1871.73 U1.62 ; PB.19 PB.20
  Bottom Layer w10: v1(1612,844) 2389,844 PB.19 ; v1(1684,1892) 1903,1892 v1(1929,1866)
NetPB_23: PB.23 PB.24 U1.30 | length 2778.9
  Top Layer w10: U1.30 2574.45,2088.27 2585.81,2099.63 2585.81,2234.19 2565,2255 2565,2537 v1(2570,2542) ; PB.23 PB.24 2974,1329 2974,1929.57 3016.62,1972.19 3016.62,2060.01 3008,2068.64 3008,2363 3021,2376 v1(3021,2542)
  Bottom Layer w10: v1(2570,2542) v1(3021,2542)
NetPB_27: PB.27 PB.28 U1.34 | length 2094.6
  Top Layer w10: U1.34 2407.95,2265.95 v1(2471,2265.95) ; v1(2700,1146) 2852.81,1298.81 2852.81,1870 2908,1925.19 v1(2908,2265) ; PB.27 PB.28
  Bottom Layer w10: v1(2471,2265.95) 2479.69,2257.26 2900.26,2257.26 v1(2908,2265) ; v1(2700,1146) 2700,1126 2816,1010 PB.28
NetPB_29: PB.29 PB.30 U1.35 | length 3477.9
  Top Layer w10: U1.35 2388.27,2288.27 v1(2423,2323) ; PB.29 PB.30 3074,1129 3248,1129 3319,1200 3319,2735 3301,2753 3100,2753 3076,2729 3076,2647.81 2995.19,2567 2995.19,2478 2964.19,2447 v1(2964.19,2339)
  Bottom Layer w10: v1(2423,2323) 2702.26,2323 2732,2293.26 2810.26,2293.26 2856,2339 v1(2964.19,2339)
NetPB_31: PB.31 PB.32 U1.36 | length 2576.1
  Top Layer w10: U1.36 2368.58,2314.58 v1(2369,2315) ; v1(2615,1125) 2834.81,1344.81 2834.81,1937 2882.19,1984.38 2882.19,2299.19 v1(2888,2305) ; PB.31 PB.32
  Bottom Layer w10: v1(2369,2315) 2387,2297 2680.26,2297 2702,2275.26 2858.26,2275.26 v1(2888,2305) ; v1(2615,1125) 2661.81,1171.81 2725.81,1171.81 2761.62,1136 2929,1136 PB.32
NetPC_1: PC.1 PC.2 U1.8 | length 2110.8
  Top Layer w10: v1(2270.16,1688.62) U1.8 ; v1(3057,1665) 3011.66,1710.34 3011.66,1820 3063.85,1872.19 3063.85,2253.19 3044.19,2272.85 3044.19,2310 3097,2362.81 3097,2667 PC.1
  Bottom Layer w10: v1(2270.16,1688.62) 2289.35,1707.81 2374.81,1707.81 2394,1688.62 3033.38,1688.62 v1(3057,1665) ; PC.1 PC.2
NetPC_3: PC.3 PC.4 U1.9 | length 4008.6
  Top Layer w10: v1(2270,1832) 2289.84,1812.16 U1.9
  Bottom Layer w10: v1(2270,1832) 2147.09,1954.91 1812.09,1954.91 1719,2048 1217,2048 1146.19,2118.81 1146.19,2539.53 1238.72,2632.06 1479.94,2632.06 1610.5,2501.5 2524.2,2501.5 2527.51,2498.19 3070.4,2498.19 3092.21,2520 3092.21,2562.21 PC.3 PC.4
NetPC_5: PC.5 PC.6 U1.10 | length 2282.4
  Top Layer w10: v1(2290,1586.62) 2290,1668.2 2309.53,1687.73 U1.10 ; v1(3183,1480) 3183,2453 PC.6
  Bottom Layer w10: v1(2290,1586.62) 2416.62,1460 3163,1460 v1(3183,1480) ; PC.5 PC.6
NetPC_9: PC.9 PC.10 U1.24 | length 1351.5
  Top Layer w10: v1(2446,1977) 2452.84,1970.16 U1.24
  Bottom Layer w10: v1(2446,1977) 2561,2092 2641.92,2092 2679.92,2130 3057,2130 3120,2067 3260,2067 3300.53,2107.53 3300.53,2249.47 PC.10 PC.9
NetPC_11: PC.11 PC.12 U1.25 | length 1118.8
  Top Layer w10: U1.25 2579.84,1989.84 v1(2580,1990) ; v1(2691,2159) 2663.38,2131.38 2663.38,2040 2680,2023.38 2725.5,2023.38 2730.88,2018 2730.88,1974.88 v1(2698,1942)
  Bottom Layer w10: v1(2580,1990) 2580,1947.5 2604.31,1923.19 2679.19,1923.19 v1(2698,1942) ; v1(2691,2159) 3089,2159 PC.11 PC.12
NetPC_17: PC.17 PC.18 U1.39 | length 1394.7
  Top Layer w10: U1.39 2309.53,2063.93 2331,2042.46 2331,1980 2386,1925 v1(2408.19,1925) ; v1(3056,1778.53) 3056,1826 PC.17
  Bottom Layer w10: v1(2408.19,1925) 2408.19,1844.81 2520,1733 3010.47,1733 v1(3056,1778.53) ; PC.17 PC.18
NetPC_19: PC.19 PC.20 U1.40 | length 1858.7
  Top Layer w10: U1.40 2289.84,2301.84 v1(2308,2320)
  Bottom Layer w10: v1(2308,2320) 2363,2375 2420,2375 2454,2341 2562.5,2341 2591.5,2370 2826.19,2370 2839.38,2383.19 3005.17,2383.19 3035.36,2353 3286,2353 3323,2316 3323,1893 PC.20 PC.19
NetPC_23: PC.23 PC.24 U1.52 | length 1701
  Top Layer w10: U1.52 v1(2116.61,2068.58)
  Bottom Layer w10: v1(2116.61,2068.58) 2136.21,2068.58 2171.81,2032.98 2273.25,2032.98 2294.18,2053.91 2372.08,2053.91 2379.49,2061.33 2432.67,2061.33 2441,2053 2441,2016 2374,1949 2374,1744.62 2404.62,1714 3080,1714 3083,1711 3083,1667 PC.23 PC.24
NetPC_27: PC.27 PC.28 U1.2 | length 2333.3
  Top Layer w10: v1(2073,1655) 2113,1695 2152.05,1695 U1.2
  Bottom Layer w10: v1(2073,1655) 2073,1236.81 2120,1189.81 2758.58,1189.81 2794.25,1154.14 3256.14,1154.14 3282.53,1180.53 3282.53,1230 3260,1252.53 3120,1252.53 3097,1275.53 3097,1367 PC.27 PC.28
OSC32_IN: C18.2 J1_OSC32.2 Y2.1 | length 383.4
  Top Layer w10: v1(2713,2568) C18.2
  Bottom Layer w10: J1_OSC32.2 2449,2610 2449.63,2610.63 Y2.1 2670.37,2610.63 v1(2713,2568)
OSC32_OUT: C19.2 J2_OSC32.2 Y2.2 | length 383.4
  Top Layer w10: C19.2 v1(2713,2732)
  Bottom Layer w10: J2_OSC32.2 2449,2690 2449.63,2689.37 Y2.2 2552.63,2732 v1(2713,2732)
OSC_IN: C16.2 U1.5 Y1.1 | length 1340.3
  Top Layer w10: C16.2 v1(1860,1789.19) ; v1(2201.75,1839.25) 2211.1,1829.9 U1.5
  Bottom Layer w10: C16.2 1964.76,1610 2071.81,1717.05 2087.83,1717.05 2115,1689.88 2115,1355 Y1.1 ; v1(1860,1789.19) 1876.94,1789.19 1909.54,1821.8 1970.62,1821.8 1988.07,1839.25 v1(2201.75,1839.25)
OSC_OUT: C17.2 U1.6 Y1.2 | length 862.5
  Top Layer w10: U1.6 2230.79,1651.21 v1(2259,1623)
  Bottom Layer w10: v1(2259,1623) 2259,1403.13 Y1.2 2402.13,1360 C17.2
RESET: C9.1 P1.1 P1.2 R2.1 U1.7 | length 1672
  Top Layer w10: R2.1 1210,1760 C9.1 ; P1.1 P1.2 ; v1(2237,1821.25) 2250.47,1807.77 U1.7
  Bottom Layer w10: C9.1 1279.21,1862.05 P1.1 1465.65,1802.82 1754.75,1802.82 1796.19,1761.38 1946.2,1761.38 1992.54,1807.72 2223.47,1807.72 v1(2237,1821.25)
USART1_TX: PA.19 PA.20 U1.42 | length 911.5
  Top Layer w10: PA.19 PA.20 2245,2860 2245,2365.47 2250.47,2360 U1.42
USART2_RX: PA.7 PA.8 PA.21 PA.22 U1.17 U1.43 | length 2350.1
  Top Layer w10: v1(2035,2874) 2225.64,2683.36 2225.64,2352.15 2230.79,2347 U1.43 v1(2230.79,2007) ; PA.22 PA.21 ; v1(2302,1987) 2302,1949.64 2420,1831.64 2441.28,1831.64 2442,1832.36 U1.17 ; PA.8 PA.7
  Bottom Layer w10: v1(2035,2874) PA.22 ; PA.21 2078,3113 2692,3113 PA.7 ; v1(2230.79,2007) 2282,2007 v1(2302,1987)
USART2_TX: PA.5 PA.6 U1.16 | length 2072
  Top Layer w10: U1.16 2427.64,1680.36 2603,1505 2736,1505 2755,1524 2755,1922.49 2766.88,1934.37 2766.88,1994.88 2826.19,2054.19 2826.19,2743.81 2812,2758 2812,2947 PA.6 PA.5
VCC: BOOT0.1 C1.1 C2.2 C3.2 C4.2 C5.2 C13.1 C23.2 C24.1 R1.1 R2.2 U1.19 U1.32 U1.48 U1.64 U2.9 VR1_OUT_Jumper.2 | length 10794.6
  Top Layer w10: C13.1 794.3,1195 810,1210.7 BOOT0.1 810,1850 839.3,1879.3 C24.1 839.3,2159 840,2159.7 C23.2 823,2317 823,2530.32 U2.9 ; C1.1 1535,1326.26 1535,1685 R2.2 1637.19,1787.19 1637.19,1976.21 1715.97,2055 C5.2 1855,2140 1860,2145 R1.1 ; v1(2112.36,2304) 2132.36,2284 ; v1(2112.36,2315) 2132.36,2295 2132.36,2284 ; v1(2132,1872) 2132,1860 2104.36,1832.36 U1.64 2009.19,1832.36 2009.19,1631.19 2042.38,1598 2170,1598 C4.2 ; U1.48 2132.36,2284 ; C3.2 2419,2410 2514.81,2314.19 2514.81,2222.12 2506,2213.31 2506,2127.64 U1.32 ; v1(2434,1858) 2439.27,1858 2453,1871.73 U1.19 ; v1(2683.5,2406) 2724,2365.5 2724,2084 C2.2
  Bottom Layer w10: C24.1 888.3,1971 ; VR1_OUT_Jumper.2 1520,1500 1571.26,1448.74 C1.1 ; C5.2 1892,2055 1899.46,2062.46 2069.54,2062.46 2091,2041 2128.65,2041 2299,1870.65 2299,1820 2268.72,1789.72 2014.92,1789.72 1968.58,1743.38 1781.62,1743.38 1740.18,1784.82 1074.48,1784.82 888.3,1971 ; R1.1 2027.36,2230 v1(2112.36,2315) ; v1(2112.36,2304) 2194,2304 C3.2 2424.24,2410 2474.92,2359.32 2547.32,2359.32 2578,2390 2667.5,2390 v1(2683.5,2406) ; v1(2132,1872) 2138,1878 2138,1936.91 1758.71,1936.91 1724.62,1971 888.3,1971 ; v1(2434,1858) 2541,1751 2984,1751 3016.62,1783.62 3016.62,2057.38 2980,2094 2734,2094 C2.2
pads on no net: J1.0 U1.1 U1.54 VR1.4

## Silkscreen, mask and mechanical layers (free items; w line width, h text height)
Top Overlay:
  text "1   0" at 770,1580 h60
  text "R G L" at 410,1370 h60
Bottom Overlay:
  text "R" at 1180,2840 h60
  text "L" at 1180,2760 h60
  text "S2DAS3" at 1440,2600 h40
  text "CK" at 1190,2520 h60
  text "SD" at 1190,2430 h60
  text "WS" at 1190,2320 h60
  text "MCK" at 1190,2240 h60
  text "CH2" at 2810,1990 h40
  text "OUT" at 2810,1930 h40
  text "CH1" at 2830,1800 h40
Mechanical 1:
  lines w10: 3937.01,0 0,0 0,3937.01 3940,3937.01 3940,3930 3940,0 ; 5495,3890 5495,3895
Drill Drawing:
  lines w10: 5260,4070 5270,4060

## Text inside footprints (layer, text, board x,y; h text height)
PA: Top Overlay "32" at 1475,2990 h50 r180; Top Overlay "31" at 1475,3090 h50 r180; Top Overlay "1" at 3135,3090 h50 r180; Top Overlay "2" at 3135,2990 h50 r180
PB: Top Overlay "2" at 1455,990 h50; Top Overlay "1" at 1455,890 h50; Top Overlay "31" at 3115,890 h50; Top Overlay "32" at 3115,990 h50
PC: Top Overlay "2" at 3220,2810 h50 r270; Top Overlay "1" at 3120,2810 h50 r270; Top Overlay "31" at 3120,1150 h50 r270; Top Overlay "32" at 3220,1150 h50 r270
U1: Mechanical 7 "Default Padstyle: RX47Y12D0T" at 2789.88,1630 h50 r90; Mechanical 7 "Alt 1 Padstyle: OX60Y90D30P" at 2969.88,1642.5 h50 r90; Mechanical 7 "Alt 2 Padstyle: OX90Y60D30P" at 3029.88,1642.5 h50 r90; Mechanical 7 "0.02in/0.5mm" at 2154.7,1515.12 h25 r90; Mechanical 7 "0.453in/11.5mm" at 2292.5,2294.88 h25 r90; Mechanical 7 "0.453in/11.5mm" at 2634.88,1892.5 h25 r90